# EAGLE board CNC-PowerSwitch-2016-v0.9 (EAGLE 7.7.0)
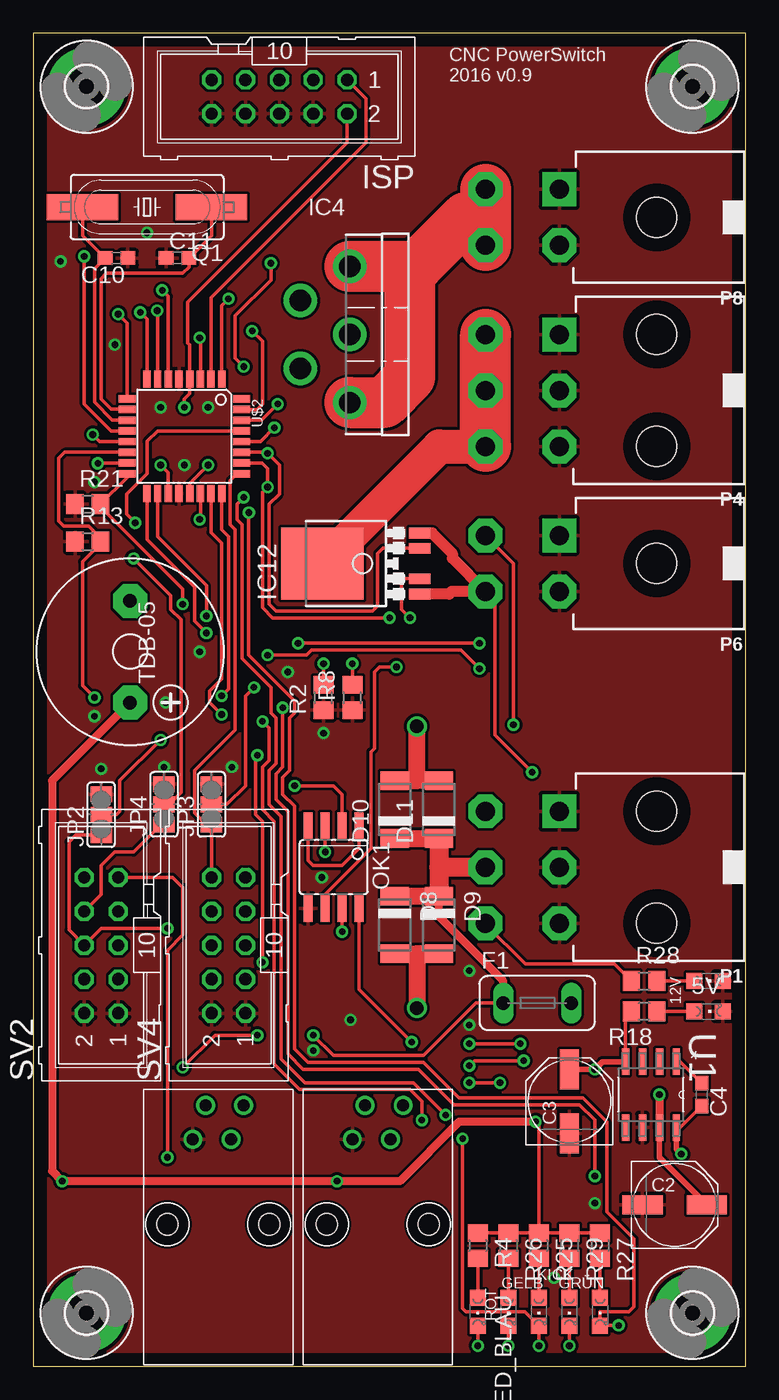
[diagram p0: board, top side]
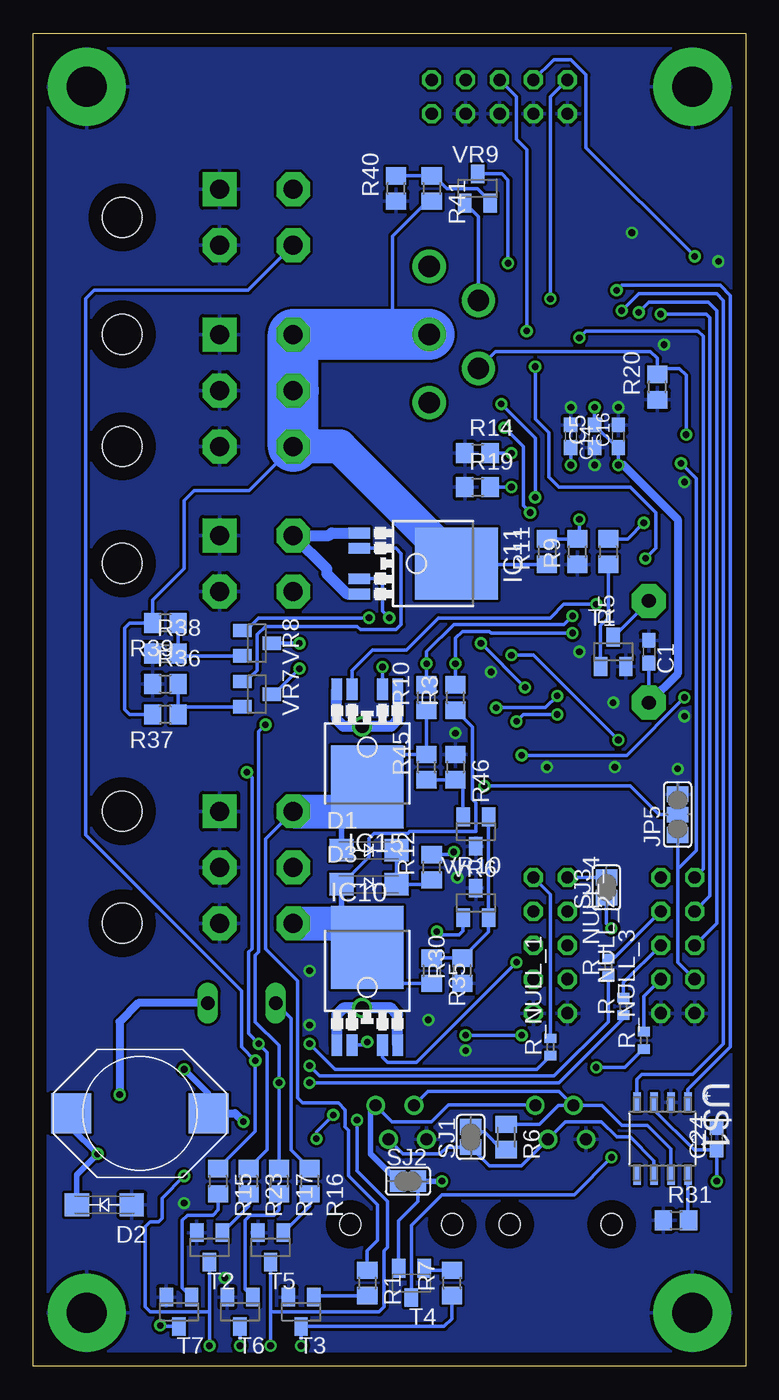
[diagram p1: board, bottom side, seen from below]

Size 53.32 x 99.75 mm. Coordinates in mm from the lower left corner, seen from the top.
Outline: 0,0 53.32,0 53.32,99.75 0,99.75 0,0
Copper layers (1*16): Top 0.035mm / dielectric 1.5mm / Bottom 0.035mm
Design rules "8mils": minimum track width 8mil, minimum drill 0.6mm, track to track 8mil, track to pad 8mil, pad to pad 8mil, via to via 8mil, smd to smd 8mil, copper to edge 40mil, drill to drill 10mil, minimum pad ring 10mil, minimum via ring 8mil, stop-mask expansion 0mil, vias tented up to drill 0mil, thermal gap 10mil

## Footprints (pad centres in the part's own frame; a part is rotated, then mirrored left to right if it is on the bottom)
CHIPLED_0805 = smd 1.2 x 1.2: A 0,-1.05; C 0,1.05
C0603 = smd 1.1 x 1: 1 -0.85,0; 2 0.85,0
PANASONIC_D = smd 3 x 1.4: + 2.4,0; - -2.4,0
SMA-DO214AC = smd 1.8 x 1.7: A -2.05,0; K 2.05,0
TMINIP2-F2-B = smd 1.4 x 2.1: A 2.159,0; C -2.159,0
TE5 = drill 1.016 long: 1 -2.54,0; 2 2.54,0
3,0-PAD = drill 3 pad 5.842: B3,0 0,0
TO220-51 = drill 1.6 pad 2.5: 1 -5.1,-4.5; 2 -2.55,-8.2; 3 0,-4.5; 4 2.55,-8.2; 5 5.1,-4.5
TO252-51 = smd 0.8 x 1.6: IN -1.14,-4.8; IS 1.14,-4.8; OUT1 -2.28,-4.8; OUT2 2.28,-4.8 | smd 5.4 x 6.2: TAB 0,2.5
ML10 = drill 0.914 octagon: 1 -5.08,-1.27; 2 -5.08,1.27; 3 -2.54,-1.27; 4 -2.54,1.27; 5 0,-1.27; 6 0,1.27; 7 2.54,-1.27; 8 2.54,1.27; 9 5.08,-1.27; 10 5.08,1.27
SJ_2 = smd 1.168 x 1.6: 1 -1.524,0; 2 0,0; 3 1.524,0
PISM = smd 3 x 3: 1 -5.15,0; 2 5.15,0
SOIC08 = smd 0.66 x 2.032: 1 -1.905,-3.073; 2 -0.635,-3.073; 3 0.635,-3.073; 4 1.905,-3.073; 5 1.905,3.073; 6 0.635,3.073; 7 -0.635,3.073; 8 -1.905,3.073
39-30-?06? = drill 1.422 pad 2.54 square: 1 4.191,0 | drill 1.422 pad 2.54 octagon: 2 0,0; 3 -4.191,0; 4 4.191,5.512; 5 0,5.512; 6 -4.191,5.512 | hole 3: -4.191,-7.3; 4.191,-7.3
39-30-?04? = drill 1.422 pad 2.54 square: 1 2.095,0 | drill 1.422 pad 2.54 octagon: 2 -2.095,0; 3 2.095,5.512; 4 -2.095,5.512 | hole 3: 0,-7.3
HC49UP = smd 5.334 x 1.93: 1 -4.826,0; 2 4.826,0
R0805 = smd 1.3 x 1.5: 1 -0.95,0; 2 0.95,0
M0805 = smd 1.3 x 1.6: 1 -0.95,0; 2 0.95,0
R0402 = smd 0.7 x 0.9: 1 -0.65,0; 2 0.65,0
RJ10 = drill 0.9: P$1 -1.905,6.55; P$2 -0.953,9.09; P$3 0.953,6.55; P$4 1.905,9.09 | hole 1.59: -3.81,0.2; 3.81,0.2
SJ = smd 1.168 x 1.6: 1 -0.762,0; 2 0.762,0
SOT23 = smd 1 x 1.4: 1 -0.95,-1.1; 2 0.95,-1.1; 3 0,1.1
SOT23-BEC = smd 1 x 1.4: B -0.95,-1.1; C 0,1.1; E 0.95,-1.1
F/CM12P = drill 1.016 pad 2.54 octagon: + 3.81,0; - -3.81,0
SOIC127P620X175-8N = smd 1.981 x 0.559: 1 -2.464,1.905; 2 -2.464,0.635; 3 -2.464,-0.635; 4 -2.464,-1.905; 5 2.464,-1.905; 6 2.464,-0.635; 7 2.464,0.635; 8 2.464,1.905
SOIC127P600X175-8N = smd 1.473 x 0.559: 1 -2.718,1.905; 2 -2.718,0.635; 3 -2.718,-0.635; 4 -2.718,-1.905; 5 2.718,-1.905; 6 2.718,-0.635; 7 2.718,0.635; 8 2.718,1.905
TQFP32-08 = smd 1.27 x 0.559: 1 -4.293,2.8; 2 -4.293,2; 3 -4.293,1.2; 4 -4.293,0.4; 5 -4.293,-0.4; 6 -4.293,-1.2; 7 -4.293,-2; 8 -4.293,-2.8; 17 4.293,-2.8; 18 4.293,-2; 19 4.293,-1.2; 20 4.293,-0.4; 21 4.293,0.4; 22 4.293,1.2; 23 4.293,2; 24 4.293,2.8 | smd 0.559 x 1.27: 9 -2.8,-4.293; 10 -2,-4.293; 11 -1.2,-4.293; 12 -0.4,-4.293; 13 0.4,-4.293; 14 1.2,-4.293; 15 2,-4.293; 16 2.8,-4.293; 25 2.8,4.293; 26 2,4.293; 27 1.2,4.293; 28 0.4,4.293; 29 -0.4,4.293; 30 -1.2,4.293; 31 -2,4.293; 32 -2.8,4.293

## Placement (x,y rotation side)
5V  [CHIPLED_0805]  50.55,26.54 270 top
12V  [CHIPLED_0805]  50.55,28.83 270 top
C1  100n  [C0603]  7.24,53.47 270 bottom
C2  47µ/35V  [PANASONIC_D]  48.01,12.06 0 top
C3  47µ/35V  [PANASONIC_D]  40.13,19.81 90 top
C4  10n/35V  [C0603]  50.04,20.32 270 top
C5  100n  [C0603]  11.3,69.6 90 bottom
C10  22p  [C0603]  6.22,82.93 180 top
C11  22p  [C0603]  10.79,82.93 0 top
C14  100n  [C0603]  13.08,69.6 270 bottom
C16  100n  [C0603]  9.53,69.6 90 bottom
C24  100n  [C0603]  2.16,17.02 270 bottom
D1  ES1A  [SMA-DO214AC]  28.19,38.61 0 bottom
D2  ES1A  [SMA-DO214AC]  48.01,12.06 180 bottom
D3  ES1A  [SMA-DO214AC]  28.19,36.07 0 bottom
D8  DB2430700L  [TMINIP2-F2-B]  27.05,33.02 270 top
D9  DB2430700L  [TMINIP2-F2-B]  30.35,33.02 270 top
D10  DB2430700L  [TMINIP2-F2-B]  27.05,41.66 90 top
D11  DB2430700L  [TMINIP2-F2-B]  30.35,41.66 90 top
F1  FUSETE5  [TE5]  37.72,27.18 0 top
GELB  [CHIPLED_0805]  37.85,4.06 180 top
GRÜN  [CHIPLED_0805]  42.42,4.06 180 top
H5  MOUNT-PAD-ROUND3.0  [3,0-PAD]  3.98,95.76 0 top
H6  MOUNT-PAD-ROUND3.0  [3,0-PAD]  49.33,95.76 0 top
H7  MOUNT-PAD-ROUND3.0  [3,0-PAD]  3.98,3.98 0 top
H8  MOUNT-PAD-ROUND3.0  [3,0-PAD]  49.33,3.98 0 top
IC4  BTS555  [TO220-51]  28.19,77.22 270 top
IC10  BTS6133  [TO252-51]  28.32,28.83 0 bottom
IC11  BTS6133  [TO252-51]  24.13,60.07 270 bottom
IC12  BTS6133  [TO252-51]  24.13,60.07 90 top
IC15  BTS6133  [TO252-51]  28.32,45.85 180 bottom
ISP  ISP  [ML10]  18.41,95 180 top
JP2  [SJ_2]  5.08,41.27 90 top
JP3  [SJ_2]  13.34,42.04 90 top
JP4  [SJ_2]  9.78,42.04 90 top
JP5  [SJ_2]  5.08,41.27 90 bottom
KICK  [CHIPLED_0805]  40.13,4.06 180 top
L2  100µ  [PISM]  45.34,18.92 180 bottom
LED_BLAU  [CHIPLED_0805]  33.27,4.06 180 top
OK1  ACPL-227-500E  [SOIC08]  22.48,37.34 180 top
P1  39-30-06?_S  [39-30-?06?]  39.37,37.34 90 top
P4  39-30-06?_S  [39-30-?06?]  39.37,73.03 90 top
P6  39-30-04?_S  [39-30-?04?]  39.37,60.07 90 top
P8  39-30-04?_S  [39-30-?04?]  39.37,85.98 90 top
Q1  16Mhz  [HC49UP]  8.51,86.74 180 top
R1  50k  [R0805]  28.32,6.22 270 bottom
R2  20k  [R0805]  21.72,50.04 90 top
R3  100k  [R0805]  21.72,50.04 90 bottom
R4  150  [R0805]  33.27,9.02 270 top
R5  4k7  [R0805]  10.29,60.96 270 bottom
R6  120  [M0805]  17.91,17.14 270 bottom
R7  50k  [R0805]  21.97,6.22 90 bottom
R8  20k  [R0805]  23.88,50.04 90 top
R9  20k  [R0805]  12.57,60.96 90 bottom
R10  100k  [R0805]  23.88,50.04 90 bottom
R11  100k  [R0805]  14.86,60.96 270 bottom
R12  1k  [R0805]  23.5,37.34 90 bottom
R13  1k  [R0805]  4.06,61.72 0 top
R14  1k  [R0805]  20.07,68.33 0 bottom
R15  100k  [R0805]  39.5,13.84 270 bottom
R16  100k  [R0805]  32.64,13.84 270 bottom
R17  100k  [R0805]  34.92,13.84 270 bottom
R18  150  [R0805]  45.72,26.54 180 top
R19  1k  [R0805]  20.07,65.79 0 bottom
R20  1k  [R0805]  6.6,73.28 90 bottom
R21  1k  [R0805]  4.06,64.52 0 top
R23  100k  [R0805]  37.21,13.84 270 bottom
R25  150  [R0805]  37.85,9.02 270 top
R26  150  [R0805]  35.56,9.02 270 top
R27  150  [R0805]  42.42,9.02 270 top
R28  560  [R0805]  45.72,28.83 0 top
R29  150  [R0805]  40.13,9.02 270 top
R30  100k 0.1%  [R0805]  21.21,29.59 90 bottom
R31  1k  [R0805]  5.21,10.92 0 bottom
R35  220k 0.1%  [R0805]  23.5,29.59 270 bottom
R36  100k 0.1%  [R0805]  43.43,51.05 0 bottom
R37  560k 0.1%  [R0805]  43.43,48.77 180 bottom
R38  100k 0.1%  [R0805]  43.43,53.34 0 bottom
R39  560k 0.1%  [R0805]  43.43,55.63 180 bottom
R40  100k 0.1%  [R0805]  26.16,88.14 90 bottom
R41  560k 0.1%  [R0805]  23.5,88.14 270 bottom
R45  910k 0.1%  [R0805]  23.88,44.83 90 bottom
R46  240k 0.1%  [R0805]  21.72,44.83 270 bottom
R_NULL_1  0  [R0402]  14.61,23.88 90 bottom
R_NULL_2  0  [R0402]  9.14,26.92 90 bottom
R_NULL_3  0  [R0402]  7.62,24.38 90 bottom
R_NULL_4  0  [R0402]  10.29,29.84 90 bottom
RJ_1  RJ10  [RJ10]  13.84,10.41 0 top
RJ_2  RJ10  [RJ10]  25.78,10.41 0 top
ROT  [CHIPLED_0805]  35.56,4.06 180 top
SJ1  [SJ]  20.57,17.14 90 bottom
SJ2  [SJ]  25.27,13.84 180 bottom
SJ3  [SJ]  10.41,35.81 90 bottom
SV2  SchalterBox  [ML10]  5.08,31.5 90 top
SV4  extraSchalter  [ML10]  14.61,31.5 90 top
T1  BC847  [SOT23]  9.91,53.47 0 bottom
T2  BC849  [SOT23]  40.13,8.89 180 bottom
T3  BC849  [SOT23]  33.27,4.06 180 bottom
T4  BC859  [SOT23-BEC]  25.02,6.22 180 bottom
T5  BC849  [SOT23]  35.56,8.89 180 bottom
T6  BC849  [SOT23]  37.85,4.06 180 bottom
T7  BC849  [SOT23]  42.42,4.06 180 bottom
TDB-05  F/CM12P  [F/CM12P]  7.24,53.47 270 top
U1  LM2675M  [SOIC127P620X175-8N]  46.23,20.32 270 top
U$1  MCP2551-I/SN  [SOIC127P600X175-8N]  6.22,17.02 270 bottom
U$2  ATMEGA64M1  [TQFP32-08]  11.3,69.6 270 top
VR6  TL431_SOT23  [SOT23]  20.19,34.67 0 bottom
VR7  TL431_SOT23  [SOT23]  36.58,50.29 270 bottom
VR8  TL431_SOT23  [SOT23]  36.58,54.1 270 bottom
VR9  TL431_SOT23  [SOT23]  20.07,88.14 0 bottom
VR10  TL431_SOT23  [SOT23]  20.19,40.01 180 bottom

## Library data of the parts
5V 12V GELB GRÜN KICK LED_BLAU ROT = led
C1-C5 C10 C11 C14 C16 C24 R1-R21 R23 R25-R31 R35-R41 R45 R46 R_NULL_1-R_NULL_4 = rcl
D1-D3 = diode
D8-D11 = DB2430700L
F1 = fuse; OC_FARNELL: unknown; OC_NEWARK: unknown
H5-H8 = holes
IC4 = micro-siemens; MF: FARNELL; MPN: BTS555.; OC_FARNELL: 4109260; OC_NEWARK: 26H6766
IC10-IC12 IC15 = BTS443P
ISP SV2 SV4 = con-ml; OC_FARNELL: unknown; OC_NEWARK: unknown
JP2-JP5 SJ1-SJ3 = jumper
L2 = Inductor-Fastron
OK1 = optocoupler; MF: VISHAY/TELEFUNKEN; MPN: ILD207T; OC_FARNELL: 1469603; OC_NEWARK: 97C8648
P1 P4 P6 P8 = con-molex-mini-fit
Q1 = crystal; OC_FARNELL: unknown; OC_NEWARK: unknown
RJ_1 RJ_2 = ownParts
T1-T7 = transistor
TDB-05 = buzzer; OC_FARNELL: unknown; OC_NEWARK: unknown
U1 = LM2675; MPN: LM2675M-3.3; OC_FARNELL: 9489800; OC_NEWARK: 41K4140; PACKAGE: 8-SOIC; SUPPLIER: National Semiconductors
U$1 = Microchip-MCP2551-I_SN; MPN: MCP2551-I/SN; OC_FARNELL: 9758569; OC_NEWARK: 69K7604; PACKAGE: SOIC-8; SUPPLIER: Microchip
U$2 = atmega16m1-32m1-64m1
VR6-VR10 = 1_USER

## Nets
12V: D8.A D9.A IC10.OUT1 IC10.OUT2
12VIN: D3.A IC10.TAB P1.6 R3.1 R28.1 R35.2
12VOUT: D8.C D9.C D10.C D11.C F1.1 P1.5 R16.1 R_NULL_3.1
24VIN: IC4.3 IC11.TAB IC12.TAB P4.4 P4.5 P4.6 R11.2 R37.2 R39.2 R41.2
+5V: C1.2 C3.+ C5.2 C16.1 C24.2 ISP.2 L2.1 R4.1 R18.2 R25.1 R26.1 R27.1 R29.1 SJ2.1 T4.E TDB-05.+ U1.4 U$1.3 U$2.4 U$2.19
ADC2/I-AKT: IC11.IS R19.2 U$2.26
ADC3/I-12V: IC10.IS R13.2 U$2.14
ADC5/I-KICK: IC12.IS R14.2 U$2.27
ADC6/I-MOT: IC4.4 R20.2 U$2.13
ADC7/I-EXT: IC15.IS R21.2 U$2.16
ADC8/12VIN: R2.2 R3.2 U$2.17
ADC9/EXT: R8.2 R10.2 U$2.18
ADC10/24VIN: R9.2 R11.1 U$2.22
AKTUATOR: IC11.OUT1 IC11.OUT2 P6.3 R17.1 R_NULL_2.1
CANH: R6.1 RJ_1.P$2 RJ_2.P$2 U$1.7
CANL: RJ_1.P$3 RJ_2.P$3 SJ1.1 U$1.6
EXT: D10.A D11.A IC15.OUT1 IC15.OUT2
EXTIN: D1.A IC15.TAB P1.4 R1.1 R10.1 R45.2
GND: 5V.C 12V.C C1.1 C2.- C3.- C5.1 C10.1 C11.1 C14.1 C16.2 C24.1 D2.A H5.B3,0 H6.B3,0 H7.B3,0 H8.B3,0 ISP.4 ISP.6 ISP.8 ISP.10 JP2.3 JP3.3 JP4.3 JP5.3 OK1.5 P1.1 P1.2 P1.3 P4.1 P4.2 P4.3 P6.1 P6.2 P8.1 P8.2 R2.1 R8.1 R9.1 R13.1 R14.1 R19.1 R20.1 R21.1 R30.1 R31.1 R36.1 R38.1 R40.1 R46.1 RJ_1.P$1 RJ_2.P$1 SV2.1 SV2.2 SV4.1 SV4.2 T1.2 T2.2 T3.2 T5.2 T6.2 T7.2 U1.6 U$1.2 U$2.5 U$2.20 VR6.3 VR10.3
ICLED_AKT: GELB.C T6.3 U$2.30
ICLED_GRUEN: GRÜN.C T7.3 U$2.28
ICLED_KICK: KICK.C T2.3 U$2.24
ICLED_ROT: ROT.C T5.3 U$2.23
KICKER: IC12.OUT1 IC12.OUT2 P6.4 R23.1 R_NULL_1.1
LED_1: SV4.7
LED_2: SV4.5
LED_3: SV4.3
LED_BLAU: SV2.9 T4.C
LED_GELB: R_NULL_2.2 SV2.5
LED_GRUEN: R_NULL_4.2 SV2.7
LED_KICK: R_NULL_1.2 SV4.9
LED_ROT: R_NULL_3.2 SV2.3
MOTION: IC4.1 IC4.5 P8.3 P8.4 R15.1 R_NULL_4.1
N$1: R5.2 T1.1
N$2: RJ_1.P$4 RJ_2.P$4 SJ2.2
N$3: U$2.32
N$4: R23.2 T2.1
N$5: KICK.A R29.2
N$6: R31.2 U$1.8
N$7: R6.2 SJ1.2
N$8: GELB.A R25.2
N$9: R26.2 ROT.A
N$10: C10.2 Q1.2 U$2.11
N$11: C11.2 Q1.1 U$2.10
N$12: JP2.2 VR7.3
N$13: C14.2 U$2.21
N$14: R1.2 T3.1
N$15: LED_BLAU.A R4.2
N$16: LED_BLAU.C R7.1 T3.3
N$17: R7.2 T4.B
N$18: JP5.2 OK1.2
N$19: JP3.2 VR8.3
N$20: T1.3 TDB-05.-
N$21: GRÜN.A R27.2
N$22: C2.+ F1.2 U1.7
N$23: JP4.2 VR9.3
N$24: 12V.A R28.2
N$25: D1.K D3.K R12.1
N$26: OK1.1 OK1.4
N$27: C4.2 D2.K L2.2 U1.8
N$28: OK1.3 R12.2
N$29: C4.1 U1.1
N$30: OK1.7 VR6.1
N$31: IC15.IN OK1.6
N$32: IC10.IN OK1.8
N$33: R30.2 R35.1 VR6.2 VR10.1
N$36: IC12.IN VR8.1
N$37: IC4.2 VR9.1
N$40: IC11.IN VR7.1
N$42: R36.2 R37.1 VR7.2
N$44: R38.2 R39.1 VR8.2
N$45: R40.2 R41.1 VR9.2
N$50: R45.1 R46.2 VR10.2
N$102: R16.2 T5.1
N$104: R17.2 T6.1
N$106: R15.2 T7.1
N$108: 5V.A R18.1
RST: ISP.5 U$2.31
RXCAN: U$1.4 U$2.7
SPEAKER: R5.1 U$2.29
SW_1: SV4.8
SW_1/SCK_A: ISP.7 U$2.12
SW_2: SV4.6
SW_2/MOSI_A: ISP.1 U$2.2
SW_3: SV4.4
SW_3/MISO_A: ISP.9 U$2.1
SW_12V: JP5.1 SV2.4 U$2.15
SW_AKT: JP2.1 SJ3.1 SV2.6 U$2.8
SW_BLAU: SV2.10 U$2.3
SW_KICK: JP3.1 SJ3.2 SV4.10 U$2.25
SW_MOT: JP4.1 SV2.8 U$2.9
TXCAN: U$1.1 U$2.6

## Tracks (layer width: path | path; a pad name or v marks a point on that pad's centre or on a via)
12V  (via drill 1)
  Top 1.27: D8.A 28.7,30.86 | D9.A 28.7,30.86 | 28.7,30.86 v28.7,26.8
  Bottom 0.813: IC10.OUT2 26.04,26.3 26.54,26.8 v28.7,26.8 29.46,26.8 30.1,26.8 30.61,26.29 IC10.OUT1
12VIN
  Top 0.254: P1.6 33.86,33.07 36.83,30.1 43.5,30.1 R28.1
  Bottom 0.254: R35.2 25.63,28.64 IC10.TAB | D3.A 28.19,38.12 28.19,39.5 27.81,39.88 25.27,39.88 25.15,40.01 20.19,40.01 20.19,42.16 20.45,42.42 20.45,47.82 R3.1
  Bottom 0.406: D3.A 30.24,33.26 30.35,33.15
  Bottom 2.54: P1.6 30.35,33.15 30.14,33.15 IC10.TAB
12VOUT  (via drill 0.5)
  Top 0.254: v11.18,22.35 13.59,24.77 v16.76,24.77 | v20.95,24.77 22.48,23.24 29.21,23.24 33.15,27.18 F1.1
  Top 0.61: F1.1 35.18,28.83 30.35,33.66 D9.C
  Top 1.27: D8.C D9.C | D10.C D11.C
  Top 1.422: D11.C 30.35,37.34 | 30.35,37.34 D9.C | P1.5 30.35,37.34
  Bottom 0.254: R_NULL_3.1 7.63,23.73 9.02,22.35 v11.18,22.35 | v16.76,24.77 v20.95,24.77 | F1.1 34.04,26.04 34.04,16.19 R16.1
24VIN
  Top 2.54: IC12.TAB 30.39,68.83 P4.6
  Top 3.81: P4.6 P4.4
  Bottom 0.254: R37.2 46.1,48.77 46.48,49.15 46.48,55.24 46.1,55.63 R39.2 44.38,57.34 42.04,59.69 42.04,64.77 41.27,65.53 37.16,65.53 P4.6 | R11.2 21.57,60.01 IC12.TAB | R41.2 23.81,87.19 26.42,84.58 26.42,77.47 26.67,77.22
  Bottom 2.54: IC12.TAB 30.39,68.83 P4.6
  Bottom 3.81: P4.5 P4.4 26.67,77.22 IC4.3 | P4.6 33.86,72.95
+5V  (via drill 0.5)
  Top 0.254: U$2.19 10.1,66.86 v9.53,67.44 | v11.3,71.75 11.3,72.39 11.7,72.79 U$2.4 11.7,76.44 11.56,76.58 11.56,79.63 23.5,91.57 ISP.2 | R27.1 R29.1 R25.1 | R25.1 37.85,18.03 v37.59,18.29 | R25.1 R26.1 R4.1 | U1.4 44.32,26.1 R18.2
  Top 0.406: U1.4 42.6,22.78 v42.02,22.21 C3.+
  Top 0.61: v37.59,18.29 31.88,18.29 27.43,13.84 v22.73,13.84 v2.16,13.84 1.4,14.61 1.4,43.81 TDB-05.+
  Bottom 0.254: v9.53,67.44 C16.1 9.6,68.75 C5.2 v11.3,71.75 | U$1.3 6.86,19.18 3.85,16.17 C24.2 v2.16,13.84 | C1.2 TDB-05.+ | T4.E 25.97,10.86 24.51,12.32 SJ2.1
  Bottom 0.406: L2.1 40.19,20.38 v42.02,22.21 | SJ2.1 v22.73,13.84
  Bottom 0.61: v9.53,67.44 9.14,67.44 5.08,63.37 5.08,51.82 TDB-05.+ | L2.1 38.23,18.92 v37.59,18.29
ADC2/I-AKT  (via drill 0.5)
  Top 0.254: U$2.26 17.11,67.6 17.53,67.18 v17.53,65.79 17.14,65.41 17.14,56.77 17.91,56.01 v26.67,56.01
  Bottom 0.254: IC11.IS 27.56,58.93 27.18,58.55 27.18,56.52 v26.67,56.01 | v17.53,65.79 R19.2
ADC3/I-12V  (via drill 0.5)
  Top 0.254: U$2.14 2.36,68.4 1.91,67.94 1.91,63.25 2.29,62.87 4.12,62.87 5.01,61.98 R13.2 5.01,61.53 3.68,60.2 3.68,50.93 v4.57,50.04 | v17.14,30.23 17.14,40.77 16.64,41.27 16.64,45.59 v16.76,45.72
  Bottom 0.254: IC10.IS 27.18,23.11 26.8,22.73 24.64,22.73 v17.14,30.23 | v4.57,50.04 8.89,45.72 v16.76,45.72
ADC5/I-KICK  (via drill 0.5)
  Top 0.254: IC12.IS 26.16,61.21 25.78,60.83 25.78,56.9 25.4,56.52 18.16,56.52 17.65,57.02 17.65,64.52 18.41,65.28 18.41,67.44 v17.53,68.33 17.46,68.4 U$2.27
  Bottom 0.254: v17.53,68.33 R14.2
ADC6/I-MOT  (via drill 0.5)
  Top 0.254: U$2.13 4.97,69.2 v4.45,69.72
  Bottom 0.254: 6.6,74.67 4.94,74.67 4.45,74.17 v4.45,69.72 | R20.2 6.6,74.67 | 6.6,74.67 6.6,75.44 7.11,75.95 18.71,75.95 IC4.4
ADC7/I-EXT  (via drill 0.5)
  Top 0.254: v11.18,57.02 11.18,58.17 5.01,64.33 R21.2 7.01,66.51 U$2.16
  Bottom 0.254: IC15.IS 29.46,52.07 27.94,53.59 25.4,53.59 22.99,56.01 14.61,56.01 13.59,57.02 v11.18,57.02
ADC8/12VIN  (via drill 0.5)
  Top 0.254: v21.72,52.58 R2.2 | U$2.17 8.5,61.85 12.06,58.29 12.06,55.75 v12.95,54.86
  Bottom 0.254: R2.2 v21.72,52.58 21.72,54.48 21.21,54.99 19.18,54.99 19.05,54.86 v12.95,54.86
ADC9/EXT  (via drill 0.5)
  Top 0.254: v23.88,52.58 R10.2 | U$2.18 9.3,62.07 12.95,58.42 v12.95,56.13
  Bottom 0.254: R10.2 v23.88,52.58 23.88,53.47 21.84,55.5 13.59,55.5 v12.95,56.13
ADC10/24VIN  (via drill 0.5)
  Top 0.254: U$2.22 12.5,63.43 v12.45,63.37
  Bottom 0.254: R11.1 R9.2 12.45,62.04 v12.45,63.37
AKTUATOR  (via drill 0.5)
  Top 0.254: v35.94,48.01 35.94,60.08 P6.3 | v32.64,21.21 v34.92,21.21
  Bottom 0.254: v35.94,48.01 36.45,47.5 36.45,30.99 36.7,30.73 36.7,25.78 34.92,24 v34.92,21.21 R17.1 | R_NULL_2.1 9.14,26.04 13.97,21.21 v32.64,21.21
  Bottom 0.813: IC11.OUT1 30.99,62.36 31.18,62.17 P6.3 31.37,59.68 31.37,59.31 29.85,57.79 IC11.OUT2
CANH
  Bottom 0.254: U$1.7 5.59,16.26 7.37,18.03 9.27,18.03 10.74,19.5 RJ_1.P$2 | RJ_1.P$2 | RJ_2.P$2 23.76,20.57 13.96,20.57 RJ_1.P$2 | R6.1 15.43,18.09 14.02,19.5 RJ_1.P$2
CANL
  Bottom 0.254: U$1.6 6.86,15.37 8.64,17.14 9.65,17.14 10.79,18.29 13.47,18.29 RJ_1.P$3 16.77,14.99 19.18,14.99 SJ1.1 22.35,16.38 22.86,15.88 25.64,15.88 RJ_2.P$3
EXT  (via drill 1)
  Top 1.27: D11.A 28.7,43.81 | D10.A 28.7,43.81 | 28.7,43.81 v28.7,47.88
  Bottom 0.813: IC15.OUT1 26.04,48.38 26.54,47.88 v28.7,47.88 30.1,47.88 30.61,48.39 IC15.OUT2
EXTIN
  Bottom 0.254: IC15.TAB 25.89,45.78 R45.2 R10.1 | R1.1 28.32,8.64 27.56,9.4 27.56,12.06 29.72,14.22 29.72,17.65 29.97,17.91 29.97,19.18 30.48,19.68 33.15,19.68 33.53,20.07 33.53,28.83 35.94,31.24 35.94,39.45 P1.4
  Bottom 0.406: D1.A 30.24,41.42 30.35,41.53
  Bottom 2.54: P1.4 30.35,41.53 30.14,41.53 IC15.TAB
GND  (via drill 0.5)
  other vias: 11.3,67.44 9.53,71.75 13.08,71.75 42.04,12.19 9.78,44.83 14.86,44.83 5.08,44.7 9.91,49.66 12.45,53.47 8.51,84.84 6.1,76.45 21.59,36.58 21.72,47.37 32.64,25.53 32.64,29.59 20.95,23.62 23.75,25.91 38.99,6.6 2.03,82.68 4.57,66.17 4.57,48.64 19.05,51.94
  pour Bottom: 0,99.82 53.34,99.82 53.34,0 0,0
  pour Top: 0,99.82 53.34,99.82 53.34,0 0,0
ICLED_AKT  (via drill 0.5)
  Top 0.254: v37.85,1.52 GELB.C | U$2.30 17.07,70.8 v18.29,72.01 | v15.75,65.02 15.24,64.52 15.24,63.37 15.62,62.99 15.62,52.96 17.78,50.8 17.78,48.9 18.16,48.51 18.16,45.09 17.65,44.58 17.65,42.04 18.54,41.15 18.54,22.99 20.32,21.21 28.45,21.21 v30.86,18.8 | v32.13,17.02 32.13,4.32 32.38,4.06 36.8,4.06 GELB.C | GELB.C 38.26,2.63
  Bottom 0.254: T6.3 v37.85,1.52 | v15.75,65.02 15.75,69.47 v18.29,72.01 | v30.86,18.8 32.13,17.53 v32.13,17.02
ICLED_GRUEN  (via drill 0.5)
  Top 0.254: U$2.28 17,69.2 v18.03,70.23 | v16.13,63.88 16.13,53.21 19.56,49.78 19.56,48.9 19.18,48.51 19.18,44.58 18.67,44.07 18.67,42.8 19.56,41.91 19.56,23.75 20.57,22.73 29.21,22.73 31.88,20.07 41.15,20.07 42.93,18.29 42.93,11.56 44.96,9.53 44.96,4.45 44.58,4.06 42.42,4.06 GRÜN.C 42.45,3.05 v43.81,3.05
  Bottom 0.254: v18.03,70.23 16.64,68.83 16.64,64.39 v16.13,63.88 | T7.3 43.73,2.96 v43.81,3.05
ICLED_KICK  (via drill 0.5)
  Top 0.254: KICK.C v40.13,1.52 | U$2.24 14.1,62.62 14.61,62.1 14.61,50.67 v14.1,50.16 | v42.04,14.22 42.04,18.41 40.89,19.56 31.5,19.56 28.83,22.23 20.19,22.23 19.05,23.37 19.05,41.53 18.16,42.42 18.16,44.32 18.67,44.83 v18.67,49.28
  Bottom 0.254: v40.13,1.52 40.13,4.06 | 40.13,4.06 T2.3 | 40.13,4.06 44.58,4.06 44.96,4.45 44.96,10.41 44.58,10.79 43.94,10.79 43.69,11.05 43.69,12.57 v42.04,14.22 | v14.1,50.16 14.99,49.28 v18.67,49.28
ICLED_ROT  (via drill 0.5)
  Top 0.254: ROT.C v35.56,1.52 | U$2.23 13.3,62.39 14.1,61.59 14.1,51.44 13.21,50.55 13.21,49.66 v14.1,48.77 | v17.14,48.26 17.65,47.75 17.65,45.34 17.14,44.83 17.14,41.66 18.03,40.77 18.03,22.61 19.94,20.7 28.19,20.7 29.08,19.81 v29.08,18.41
  Bottom 0.254: v35.56,1.52 35.56,3.94 | 35.56,3.94 T5.3 | v17.14,48.26 16.64,48.77 v14.1,48.77 | v29.08,18.41 29.08,14.61 26.8,12.32 26.8,8.89 27.05,8.64 27.05,4.45 27.43,4.06 35.43,4.06 35.56,3.94
KICKER  (via drill 0.5)
  Top 0.254: P6.4 34.54,57.29 34.54,47.24 v37.34,44.45 | v32.64,24.13 v36.45,24.13
  Top 0.813: IC12.OUT2 29.85,62.35 31.37,60.83 31.37,60.47 P6.4 31.3,57.98 31.11,57.78 IC12.OUT1
  Bottom 0.254: v37.34,44.45 36.96,44.07 36.96,31.24 37.21,30.99 37.21,24.89 v36.45,24.13 35.81,23.5 35.81,16.19 R23.1 | R_NULL_1.1 15.62,22.23 30.73,22.23 v32.64,24.13
LED_BLAU  (via drill 0.5)
  Top 0.254: v10.03,15.62 10.03,31.11 11.18,32.26 11.18,35.81 10.41,36.58 SV2.9
  Bottom 0.254: T4.C 25.02,10.54 22.73,12.83 12.83,12.83 v10.03,15.62
LED_GELB
  Bottom 0.254: SV2.5 9.14,28.7 R_NULL_2.2
LED_GRUEN
  Bottom 0.254: SV2.7 9.78,30.61 10.18,30.61 R_NULL_4.2
LED_KICK
  Bottom 0.254: SV4.9 14.61,35.31 R_NULL_1.2
LED_ROT
  Bottom 0.254: SV2.3 7.62,27.69 R_NULL_3.2
MOTION  (via drill 0.5)
  Top 0.254: v36.7,22.86 33.02,22.86 v32.64,22.48
  Top 3.81: IC4.5 26.27,72.12 28.19,74.04 28.19,81.79 28.72,82.32 | IC4.1 28.72,82.32 | 28.72,82.32 32.38,85.98 33.78,85.98 | 33.78,85.98 33.86,85.9 P8.4 | P8.3 33.86,85.98 33.78,85.98
  Bottom 0.254: P8.4 37.22,80.52 48.77,80.52 49.4,79.88 49.4,39.75 37.72,28.07 37.72,23.88 v36.7,22.86 36.7,17.59 R15.1 | R_NULL_4.1 10.29,25.78 14.35,21.72 31.88,21.72 v32.64,22.48
N$1
  Bottom 0.254: R5.2 10.29,56.01 10.86,55.44 T1.1
N$2
  Bottom 0.254: RJ_2.P$4 26.47,18.29 23.5,18.29 22.23,19.56 15.8,19.56 RJ_1.P$4
  Bottom 0.406: SJ2.2 28.07,15.88 28.07,19.12 RJ_2.P$4
N$4
  Bottom 0.254: R23.2 37.21,11.96 T2.1
N$5
  Top 0.254: R29.2 KICK.A
N$6
  Bottom 0.254: U$1.8 4.32,10.98 R31.2
N$7
  Bottom 0.254: R6.2 18.23,16.2 19.56,17.53 20.19,17.53 SJ1.2
N$8
  Top 0.254: R25.2 GELB.A
N$9
  Top 0.254: R26.2 ROT.A
N$10
  Top 0.254: Q1.2 3.68,84.62 C10.2 4.57,82.13 4.57,72.14 5.91,70.8 U$2.11
N$11
  Top 0.254: Q1.1 13.34,84.62 C11.2 11.64,82.26 11.18,81.79 5.46,81.79 5.08,81.41 5.08,72.39 5.84,71.63 6.98,71.63 U$2.10
N$12  (via drill 0.5)
  Top 0.254: v33.4,52.2 32,53.59 20.83,53.59 20.45,53.21 v17.53,53.21 | JP2.2 6.22,41.27 6.48,41.53 6.48,43.81 v9.53,46.86
  Bottom 0.254: VR7.3 35.31,50.29 v33.4,52.2 | v17.53,53.21 15.88,53.21 v9.53,46.86
N$13  (via drill 0.5)
  Top 0.254: U$2.21 11.7,66.06 v13.08,67.44
  Bottom 0.254: v13.08,67.44 C14.2
N$14
  Bottom 0.254: R1.2 32.22,5.27 T3.1
N$15
  Top 0.254: R4.2 LED_BLAU.A
N$16  (via drill 0.5)
  Top 0.254: v33.27,1.52 LED_BLAU.C
  Bottom 0.254: v33.27,1.52 T3.3 22.56,2.96 21.97,3.56 R7.1
N$17
  Bottom 0.254: R7.2 23.92,7.17 T4.B
N$18  (via drill 0.5)
  Top 0.254: OK1.2 23.11,42.8 22.48,43.43 v19.56,43.43
  Bottom 0.254: v19.56,43.43 8.64,43.43 6.48,41.27 JP5.2
N$19  (via drill 0.5)
  Top 0.254: v33.4,54.1 v19.81,54.1 | JP3.2 14.48,42.04 15.88,43.43 15.88,50.16 v16.51,50.8
  Bottom 0.254: VR8.3 v33.4,54.1 | v16.51,50.8 v19.81,54.1
N$20
  Bottom 0.254: TDB-05.- 7.24,57.23 T1.3
N$21
  Top 0.254: R27.2 GRÜN.A
N$22  (via drill 0.5)
  Top 0.406: C2.+ 46.86,15.61 U1.7
  Top 0.61: v46.86,20.32 U1.7
  Bottom 0.61: F1.2 45.47,27.18 46.86,25.78 v46.86,20.32
N$23  (via drill 0.5)
  Top 0.254: v15.75,74.8 15.11,75.44 15.11,78.61 17.78,81.28 v17.78,82.55 | JP4.2 10.16,42.04 11.05,42.93 11.05,55.88 10.29,56.64 10.29,57.66 v7.49,60.45
  Bottom 0.254: v15.75,74.8 15.75,70.87 14.73,69.85 14.73,66.55 13.97,65.79 8.64,65.79 6.73,63.88 6.73,61.21 v7.49,60.45 | VR9.3 18.25,89.24 17.78,88.77 v17.78,82.55
N$24
  Top 0.254: R28.2 12V.A
N$25
  Bottom 0.254: R12.1 23.82,36.07 D3.K D1.K
N$26
  Top 0.254: OK1.4 20.57,37.85 20.95,37.47 23.11,37.47 24.38,38.73 OK1.1
N$27  (via drill 0.5)
  Top 0.254: U1.8 48.42,17.86 C4.2
  Top 0.406: U1.8 48.13,16.26 v48.51,15.88
  Bottom 0.406: D2.K 50.06,14.33 v48.51,15.88 50.49,17.85 L2.2
N$28  (via drill 0.5)
  Top 0.254: v21.84,38.48 OK1.3
  Bottom 0.254: R12.2 22.04,38.29 v21.84,38.48
N$29
  Top 0.254: U1.1 48.42,22.78 C4.1
N$30  (via drill 0.5)
  Top 0.254: v23.11,32.51 OK1.7
  Bottom 0.254: VR6.1 21.14,32.58 21.46,32.26 22.86,32.26 v23.11,32.51
N$31  (via drill 0.5)
  Top 0.254: OK1.6 21.84,35.31 25.27,38.73 25.27,45.97 25.53,46.23 25.53,51.94 25.91,52.32 v27.18,52.32
  Bottom 0.254: IC15.IN v27.18,52.32
N$32  (via drill 0.5)
  Top 0.254: OK1.8 24.38,28.19 v28.32,24.26
  Bottom 0.254: IC10.IN 28.55,24.03 v28.32,24.26
N$33
  Bottom 0.254: VR10.1 VR6.2 19.24,32.51 R30.2 R35.1
N$36  (via drill 0.5)
  Top 0.254: IC12.IN 27.82,58.93 27.56,58.67 27.56,56.64 v28.19,56.01
  Bottom 0.254: VR8.1 37.36,55.37 37.08,55.37 36.45,56.01 v28.19,56.01
N$37
  Bottom 0.254: IC4.2 19.99,86.02 VR9.1
N$40
  Bottom 0.254: IC11.IN 26.16,61.21 25.78,60.83 25.78,55.5 26.16,55.12 28.83,55.12 29.08,55.37 35.94,55.37 36.58,54.74 36.58,52.07 37.08,51.56 37.36,51.56 VR7.1
N$42
  Bottom 0.254: VR7.2 41.91,49.34 R37.1 R36.2
N$44
  Bottom 0.254: VR8.2 42.3,53.15 R38.2 R39.1
N$45
  Bottom 0.254: VR9.2 19.12,87.19 20.07,88.14 22.35,88.14 22.99,88.77 23.18,88.77 R41.1 R40.2
N$50
  Bottom 0.254: R45.1 R46.2 21.14,43.31 VR10.2
N$102
  Bottom 0.254: R16.2 32.64,11.96 T5.1
N$104
  Bottom 0.254: R17.2 34.92,11.68 35.31,11.3 37.08,11.3 37.47,10.92 37.47,5.73 T6.1
N$106
  Bottom 0.254: R15.2 39.5,11.68 39.88,11.3 41.78,11.3 42.16,10.92 42.16,5.86 T7.1
N$108
  Top 0.254: R18.1 5V.A
RST  (via drill 0.5)
  Top 0.254: v16.38,77.47 17.14,76.71 17.14,72.01 16.73,71.6 U$2.31
  Bottom 0.254: ISP.5 17.14,95 17.14,91.82 16.38,91.06 v16.38,77.47
RXCAN  (via drill 0.5)
  Top 0.254: U$2.7 9.3,78.96 v9.27,78.99
  Bottom 0.254: v9.27,78.99 8,80.26 2.16,80.26 1.65,79.76 1.65,24.13 3.94,21.84 7.75,21.84 8.13,21.46 U$1.4
SPEAKER  (via drill 0.5)
  Top 0.254: U$2.29 9.29,70 8.51,69.22 8.51,66.8 6.99,65.28 6.99,63.75 v7.62,63.12
  Bottom 0.254: 10.29,61.98 R5.1 8.83,61.91 v7.62,63.12
SW_1/SCK_A  (via drill 0.5)
  Top 0.254: U$2.12 5.82,70 3.81,72.01 v3.81,83.06
  Bottom 0.254: ISP.7 14.35,97.79 13.08,97.79 11.94,96.65 11.94,91.19 v3.81,83.06
SW_2/MOSI_A
  Top 0.254: U$2.2 13.3,79.98 24.89,91.57 24.89,94.87 ISP.1
SW_3/MISO_A  (via drill 0.5)
  Top 0.254: U$2.1 14.1,79.38 v14.61,79.88
  Bottom 0.254: ISP.9 14.61,95 v14.61,79.88
SW_12V  (via drill 0.5)
  Top 0.254: U$2.15 4.86,67.6 v4.83,67.56
  Bottom 0.254: SV2.4 5.08,30.23 5.08,37.21 | 5.08,37.21 3.68,38.61 3.68,66.42 4.32,67.06 v4.83,67.56 | 5.08,37.21 JP5.1
SW_AKT  (via drill 0.5)
  Top 0.254: U$2.8 8.5,78.36 v8,78.87 | JP2.1 3.17,39.75 2.67,39.24 2.67,32.64 SV2.6 5.08,32.77 v10.03,32.77
  Bottom 0.254: SV2.6 2.16,33.15 2.16,78.99 2.79,79.63 7.24,79.63 v8,78.87 | v10.03,32.77 10.41,33.15 SJ3.1
SW_BLAU  (via drill 0.5)
  Top 0.254: U$2.3 12.5,76.91 v12.45,76.96
  Bottom 0.254: SV2.10 3.17,37.21 3.17,77.09 3.56,77.47 11.94,77.47 v12.45,76.96
SW_KICK
  Top 0.254: SV4.10 JP3.1 13.08,40.77 12.7,40.77 12.06,41.4 12.06,44.58 15.11,47.62 15.11,62.61 14.73,62.99 14.73,66.29 15.23,66.8 U$2.25
  Bottom 0.254: SJ3.2 SV4.10
SW_MOT  (via drill 0.5)
  Top 0.254: U$2.9 7.01,78.08 v6.35,78.74 | JP4.1 9.53,40.51 7.49,38.48 6.1,38.48 5.08,37.47 5.08,35.31 SV2.8
  Bottom 0.254: SV2.8 2.67,35.18 2.67,78.49 2.92,78.74 v6.35,78.74
TXCAN  (via drill 0.5)
  Top 0.254: U$2.6 10.1,80.07 v9.65,80.52
  Bottom 0.254: U$1.1 4.32,20.7 1.14,23.88 1.14,80.14 1.91,80.9 9.27,80.9 v9.65,80.52

## Text on the board
tNames: CNC PowerSwitch | 2016 v0.9
Document: Speaker